# Altium PCB PCB2.PcbDoc
Units mm, origin at the board's own origin, x right, y up, seen from the top; angles counter-clockwise.
Board outline 187.25 x 180.25 mm, 2 copper layers (Top Layer, Bottom Layer); 100 components, 79 nets, 432 pads, 0 vias.
Unrouted connection lines stored in the file: 9.
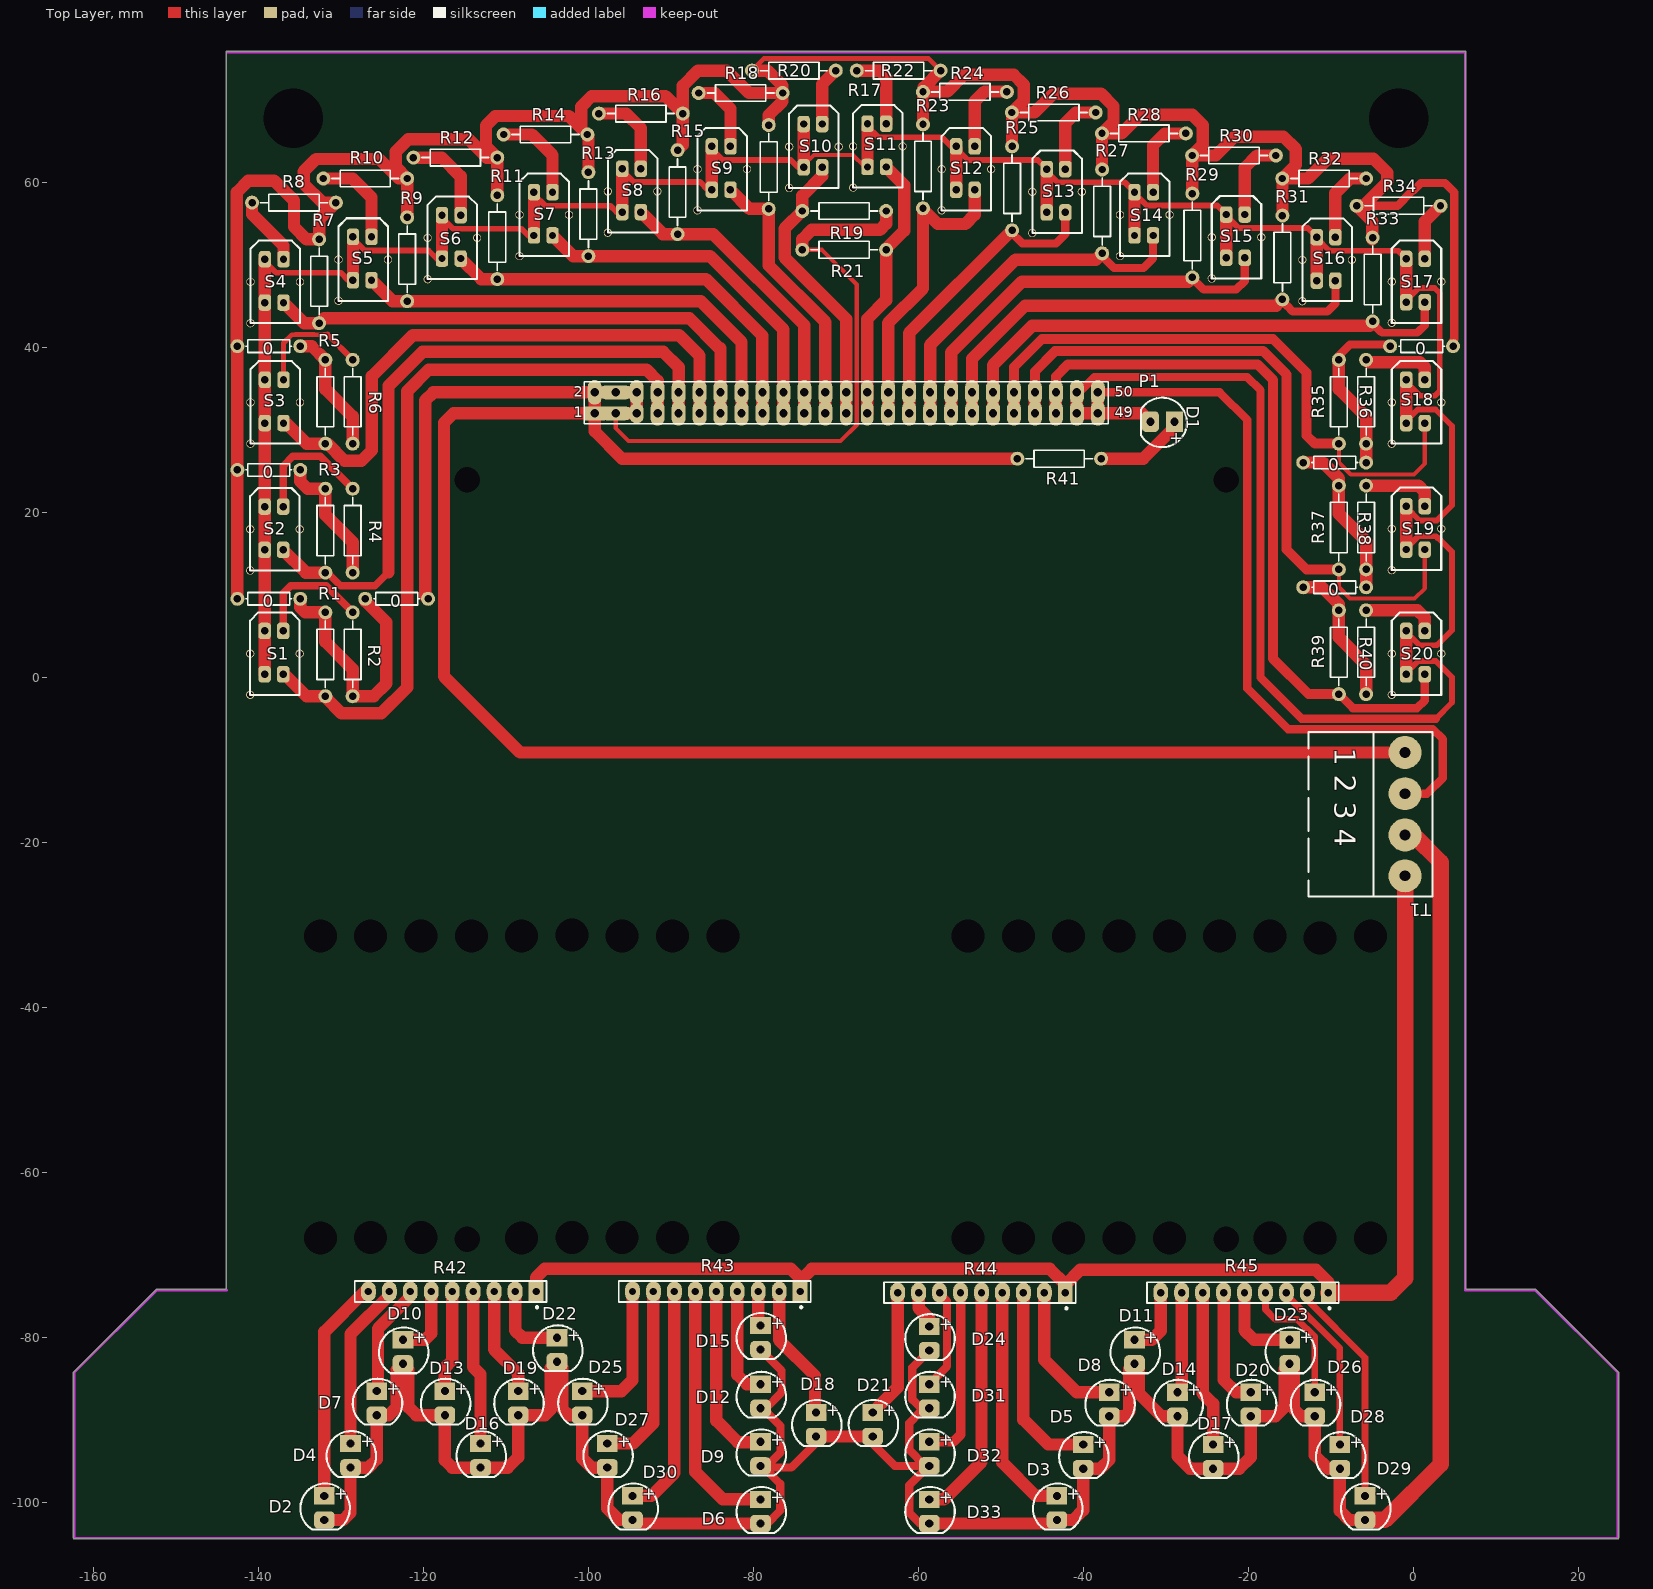
[diagram p0: Top Layer view]
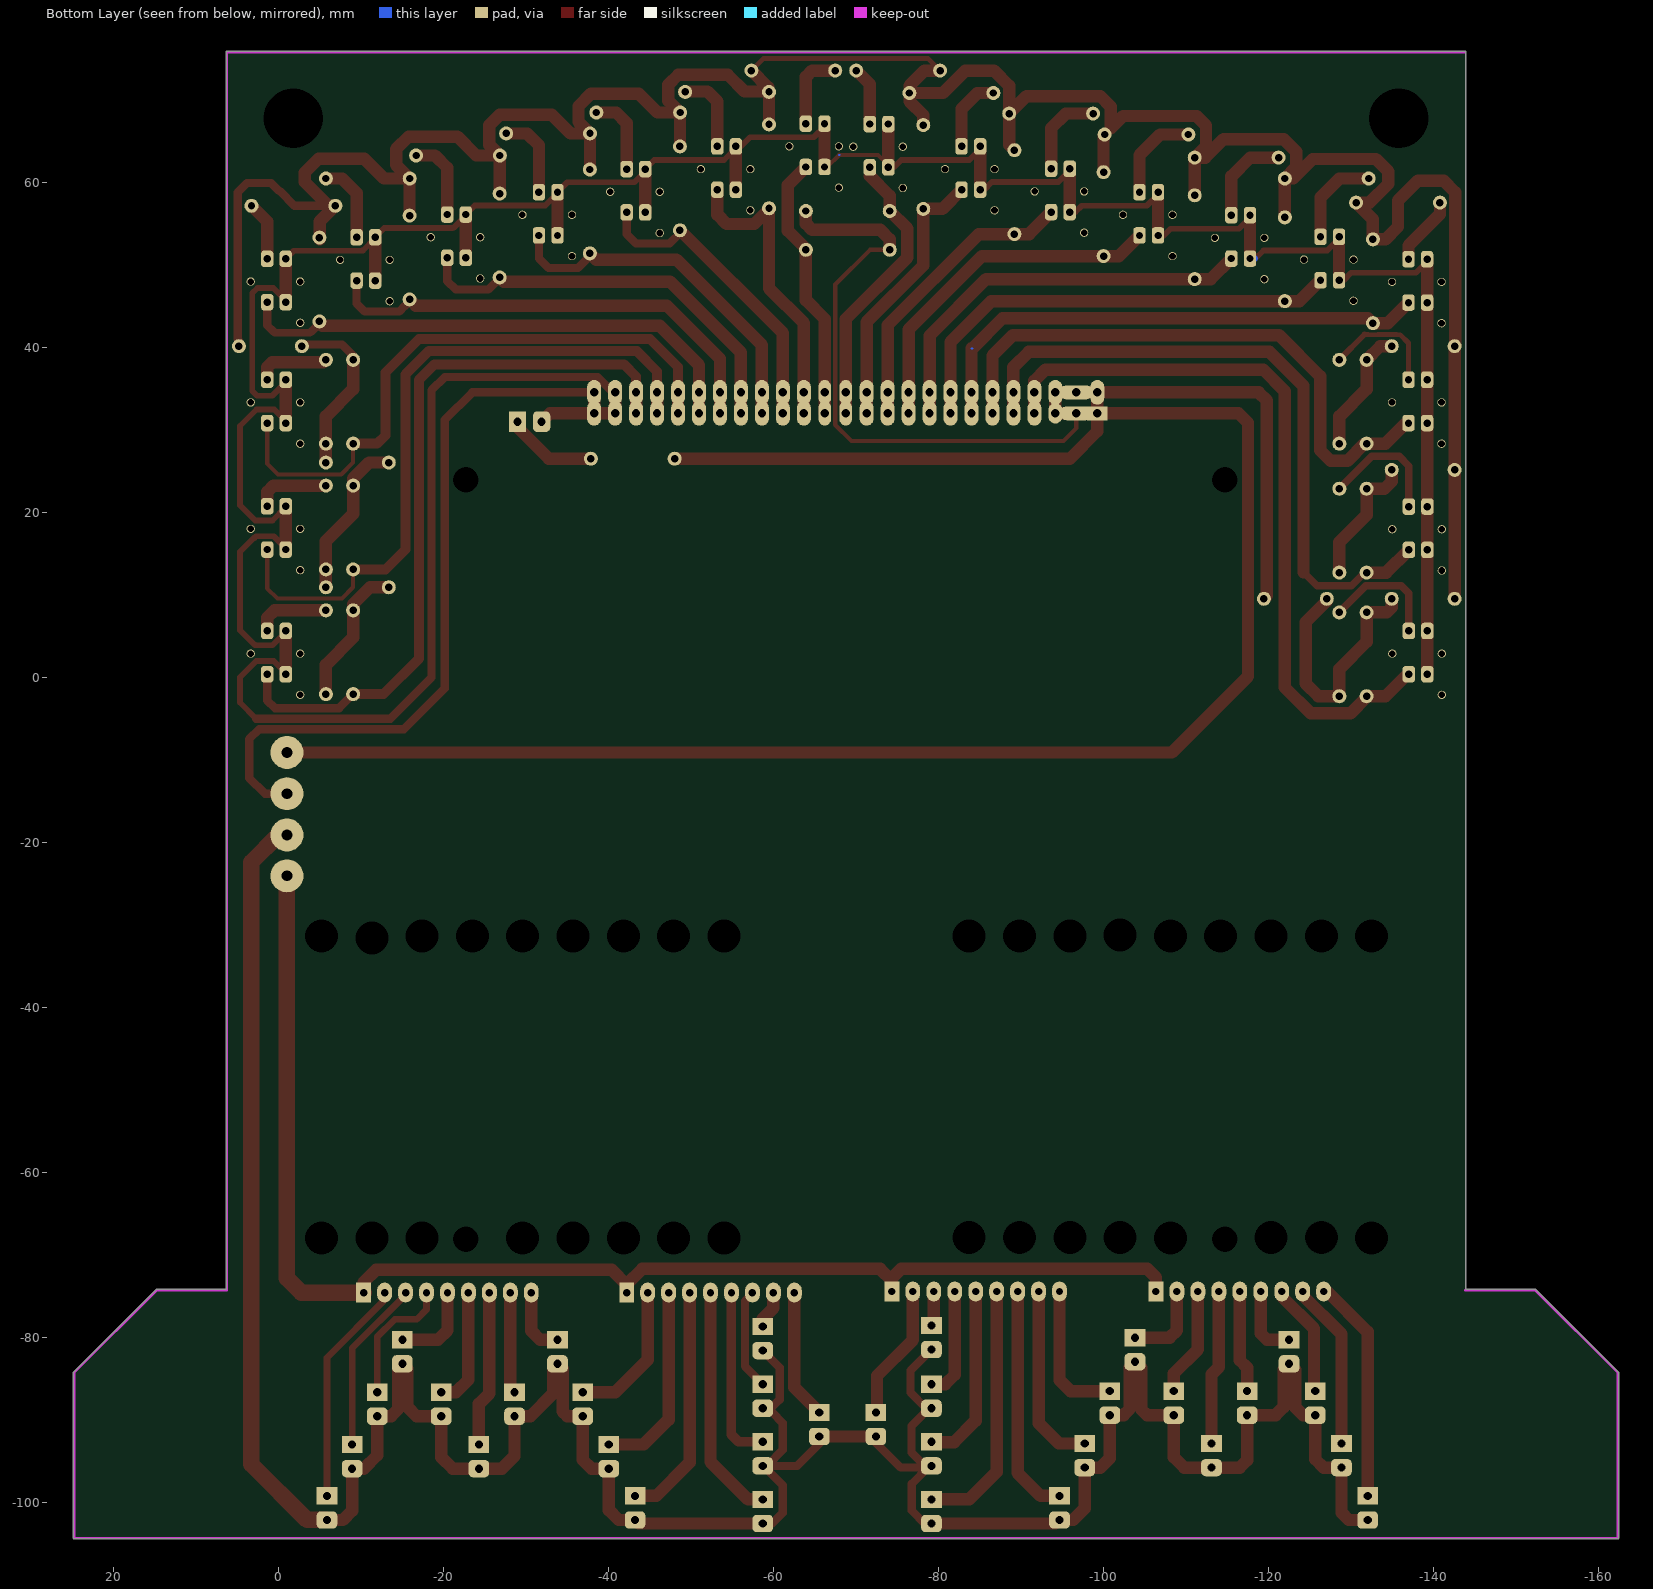
[diagram p1: Bottom Layer view, seen from below]

## Layer stack, top to bottom
Top Solder: solder mask 0.0102, Solder Resist, Dk 3.5
Top Layer: signal copper 0.0356
Dielectric 1: dielectric 0.32, FR-4, Dk 4.8
Bottom Layer: signal copper 0.0356
Bottom Solder: solder mask 0.0102, Solder Resist, Dk 3.5

## Board outline
-162.391,-104.22 -162.391,-84.22 cw(c-162.264,-84.22) -162.354,-84.129 -162.354,-84.13 -152.354,-74.13 -152.355,-74.13 cw(c-152.264,-74.22) -152.264,-74.093 -143.891,-74.093 -143.891,75.78 cw(c-143.764,75.78) -143.764,75.907 6.236,75.907 cw(c6.236,75.78) 6.363,75.78 6.363,-74.093 14.736,-74.093 cw(c14.736,-74.22) 14.826,-74.13 24.826,-84.13 24.826,-84.129 cw(c24.736,-84.22) 24.863,-84.22 24.863,-104.22 cw(c24.736,-104.22) 24.736,-104.347 -162.264,-104.347 cw(c-162.264,-104.22)

## Design rules (kind name [scope] priority, off if disabled: settings)
Clearance [All] p1: gap=0.254 ignorepadtopadclearanceinfootprint=FALSE except(0: Arc-Hole Track-Hole SMDPad-Hole THPad-Hole Via-Hole Fill-Hole Poly-Hole Region-Hole Text-Hole)
PolygonConnect [All] p1: connectstyle=Relief reliefconductorwidth=0.254 reliefentries=4 polygonreliefangle="90 Angle" airgapwidth=0.254
RoutingLayers [All] p1: top layer_v5=TRUE bottom layer_v5=FALSE
RoutingVias [All] p1: holewidth=0.711 width=1.27 viastyle="Through Hole" minholewidth=0.711 minwidth=1.27 maxholewidth=0.711 maxwidth=1.27
SolderMaskExpansion [All] p1: expansion=0.102
Width [All] p1: maxlimit=3 minlimit=0.254 preferedwidth=0.254
29 further rules are at their usual default settings.

## Components (designator, comment, footprint, x,y, rotation, side; value= is the part's Value field where it differs from the comment)
D1 "LED 5mm" LED-1 -30.353,31.035 r270 top
D2 "LED 5mm" LED-1 -131.977,-100.537 r0 top
D3 "LED 5mm" LED-1 -43.204,-100.537 r0 top
D4 "LED 5mm" LED-1 -128.802,-94.187 r0 top
D5 "LED 5mm" LED-1 -40.029,-94.314 r0 top
D6 "LED 5mm" LED-1 -79.121,-100.965 r0 top
D7 "LED 5mm" LED-1 -125.627,-87.837 r0 top
D8 "LED 5mm" LED-1 -36.854,-87.964 r0 top
D9 "LED 5mm" LED-1 -79.121,-93.98 r0 top
D10 "LED 5mm" LED-1 -122.452,-81.614 r0 top
D11 "LED 5mm" LED-1 -33.806,-81.614 r0 top
D12 "LED 5mm" LED-1 -79.121,-86.995 r0 top
D13 "LED 5mm" LED-1 -117.372,-87.837 r0 top
D14 "LED 5mm" LED-1 -28.599,-87.964 r0 top
D15 "LED 5mm" LED-1 -79.121,-79.883 r0 top
D16 "LED 5mm" LED-1 -113.054,-94.187 r0 top
D17 "LED 5mm" LED-1 -24.281,-94.314 r0 top
D18 "LED 5mm" LED-1 -72.39,-90.424 r0 top
D19 "LED 5mm" LED-1 -108.482,-87.837 r0 top
D20 "LED 5mm" LED-1 -19.709,-87.964 r0 top
D21 "LED 5mm" LED-1 -65.532,-90.424 r0 top
D22 "LED 5mm" LED-1 -103.783,-81.36 r0 top
D23 "LED 5mm" LED-1 -15.01,-81.614 r0 top
D24 "LED 5mm" LED-1 -58.674,-80.01 r0 top
D25 "LED 5mm" LED-1 -100.735,-87.837 r0 top
D26 "LED 5mm" LED-1 -11.962,-87.964 r0 top
D27 "LED 5mm" LED-1 -97.687,-94.187 r0 top
D28 "LED 5mm" LED-1 -8.914,-94.314 r0 top
D29 "LED 5mm" LED-1 -5.866,-100.537 r0 top
D30 "LED 5mm" LED-1 -94.639,-100.537 r0 top
D31 "LED 5mm" LED-1 -58.674,-86.995 r0 top
D32 "LED 5mm" LED-1 -58.674,-93.98 r0 top
D33 "LED 5mm" LED-1 -58.674,-100.965 r0 top
P1 "Header 25X2" HDR2X25 -99.211,32.051 r0 top
R1 "Res2" AXIAL-0.4 -131.85,2.841 r90 top
R2 "Res2" AXIAL-0.4 -128.548,2.841 r270 top
R3 "Res2" AXIAL-0.4 -131.85,17.827 r90 top
R4 "Res2" AXIAL-0.4 -128.548,17.827 r270 top
R5 "Res2" AXIAL-0.4 -131.85,33.448 r90 top
R6 "Res2" AXIAL-0.4 -128.548,33.448 r270 top
R7 "Res2" AXIAL-0.4 -132.612,48.053 r90 top
R8 "Res2" AXIAL-0.4 -135.66,57.578 r0 top
R9 "Res2" AXIAL-0.4 -121.944,50.72 r90 top
R10 "Res2" AXIAL-0.4 -127.024,60.499 r0 top
R11 "Res2" AXIAL-0.4 -111.022,53.387 r90 top
R12 "Res2" AXIAL-0.4 -116.102,63.039 r0 top
R13 "Res2" AXIAL-0.4 -99.973,56.181 r90 top
R14 "Res2" AXIAL-0.4 -105.18,65.833 r0 top
R15 "Res2" AXIAL-0.4 -89.178,58.848 r90 top
R16 "Res2" AXIAL-0.4 -93.623,68.373 r0 top
R17 "Res2" AXIAL-0.4 -78.129,61.896 r90 top
R18 "Res2" AXIAL-0.4 -81.534,70.866 r0 top
R19 "Res2" AXIAL-0.4 -68.985,56.562 r0 top
R20 "Res2" AXIAL-0.4 -75.081,73.58 r180 top
R21 "Res2" AXIAL-0.4 -68.985,51.863 r180 top
R22 "Res2" AXIAL-0.4 -62.381,73.58 r0 top
R23 "Res2" AXIAL-0.4 -59.436,61.976 r90 top
R24 "Res2" AXIAL-0.4 -54.356,70.993 r180 top
R25 "Res2" AXIAL-0.4 -48.641,59.309 r90 top
R26 "Res2" AXIAL-0.4 -43.585,68.5 r180 top
R27 "Res2" AXIAL-0.4 -37.719,56.515 r90 top
R28 "Res2" AXIAL-0.4 -32.663,65.96 r180 top
R29 "Res2" AXIAL-0.4 -26.797,53.594 r90 top
R30 "Res2" AXIAL-0.4 -21.741,63.293 r180 top
R31 "Res2" AXIAL-0.4 -15.875,50.927 r90 top
R32 "Res2" AXIAL-0.4 -10.819,60.499 r180 top
R33 "Res2" AXIAL-0.4 -4.953,48.26 r90 top
R34 "Res2" AXIAL-0.4 -1.802,57.197 r180 top
R35 "Res2" AXIAL-0.4 -9.041,33.448 r90 top
R36 "Res2" AXIAL-0.4 -5.739,33.448 r270 top
R37 "Res2" AXIAL-0.4 -9.041,18.208 r90 top
R38 "Res2" AXIAL-0.4 -5.739,18.208 r270 top
R39 "Res2" AXIAL-0.4 -9.041,3.095 r90 top
R40 "Res2" AXIAL-0.4 -5.739,3.095 r270 top
R41 "Res2" AXIAL-0.4 -42.926,26.543 r0 top
R42 "Resistor Array" "Res arrya" -106.323,-74.375 r180 top
R43 "Resistor Array" "Res arrya" -74.319,-74.375 r180 top
R44 "Resistor Array" "Res arrya" -42.188,-74.502 r180 top
R45 "Resistor Array" "Res arrya" -10.311,-74.502 r180 top
S1 "TCRT5000" TCRT5000 -140.966,-2.072 r90 top
S2 "TCRT5000" TCRT5000 -140.966,12.998 r90 top
S3 "TCRT5000" TCRT5000 -140.93,28.365 r90 top
S4 "TCRT5000" TCRT5000 -140.93,42.97 r90 top
S5 "TCRT5000" TCRT5000 -130.262,45.68 r90 top
S6 "TCRT5000" TCRT5000 -119.467,48.304 r90 top
S7 "TCRT5000" TCRT5000 -108.327,51.098 r90 top
S8 "TCRT5000" TCRT5000 -97.623,53.935 r90 top
S9 "TCRT5000" TCRT5000 -86.765,56.642 r90 top
S10 "TCRT5000" TCRT5000 -75.652,59.353 r90 top
S11 "TCRT5000" TCRT5000 -67.905,59.396 r90 top
S12 "TCRT5000" TCRT5000 -57.174,56.642 r90 top
S13 "TCRT5000" TCRT5000 -46.188,53.892 r90 top
S14 "TCRT5000" TCRT5000 -35.556,51.098 r90 top
S15 "TCRT5000" TCRT5000 -24.439,48.387 r90 top
S16 "TCRT5000" TCRT5000 -13.458,45.637 r90 top
S17 "TCRT5000" TCRT5000 -2.627,43.013 r90 top
S18 "TCRT5000" TCRT5000 -2.627,28.365 r90 top
S19 "TCRT5000" TCRT5000 -2.627,13.041 r90 top
S20 "TCRT5000" TCRT5000 -2.627,-2.072 r90 top
T1 "Phoenix terminal" "phoenix terminal 4" -12.7,-6.557 r270 top

## Footprints (in the part's own frame and the unit in brackets; to place one, negate y for a bottom-side part, rotate by r counter-clockwise, add the part's x,y. Pads: shape width x height; smd on the part's side, far side on the other; paste and mask are expansions set on the pad)
AXIAL-0.4 [mm] "Axial Device, Thru-Hole; 2 Leads; 0.4 in Pin Spacing"
  round 1.7 hole 0.9: 1(-5.08,0) 2(5.08,0)
  silkscreen extent -4.06,-1.02 4.06,1.02
HDR2X25 [mm] "Connector; Header; 25x2 Position"
  rect 2.5x1.7 hole 1: 1(0,0)
  oval 1.7x3 hole 1: 2(0,2.54) 6(5.08,2.54) 7(7.62,0) 8(7.62,2.54) 9(10.16,0) 10(10.16,2.54) 11(12.7,0) 12(12.7,2.54) 13(15.24,0) 14(15.24,2.54) 15(17.78,0) 16(17.78,2.54) 17(20.32,0) 18(20.32,2.54) 19(22.86,0) 20(22.86,2.54) 21(25.4,0) 22(25.4,2.54) 23(27.94,0) 24(27.94,2.54) 29(35.56,0) 30(35.56,2.54) 31(38.1,0) 32(38.1,2.54) 33(40.64,0) 34(40.64,2.54) 35(43.18,0) 36(43.18,2.54) 37(45.72,0) 38(45.72,2.54) 39(48.26,0) 40(48.26,2.54) 41(50.8,0) 42(50.8,2.54) 43(53.34,0) 44(53.34,2.54) 45(55.88,0) 46(55.88,2.54) 47(58.42,0) 48(58.42,2.54) 49(60.96,0) 50(60.96,2.54)
  oval 4x1.7 hole 1: 3(2.54,0) 4(2.54,2.54)
  oval 1.7x2.5 hole 1: 5(5.08,0)
  oval 1.5x3 hole 1: 25(30.48,0) 26(30.48,2.54) 27(33.02,0) 28(33.02,2.54)
  silkscreen extent -1.27,-1.27 62.23,3.81
LED-1 [mm] "LED; 2 Leads"
  rect 2.5x2.1 hole 1: 1(0,1.397)
  rrect50% 2.5x2.1 hole 1: 2(0,-1.524)
  silkscreen extent -2.91,-2.67 3.09,2.9
"phoenix terminal 4" [mm] "4 terminals"
  round 4 hole 1.3: 1(2.493,11.684) 2(7.493,11.684) 3(12.493,11.684) 4(17.446,11.684)
  silkscreen extent 0,0 19.94,15
"Res arrya" [mm] "Resistor; Array;"
  rect 1.8x2.4 hole 0.9: 1(0,0)
  oval 1.8x2.4 hole 0.9: 2(2.54,0) 3(5.08,0) 4(7.62,0) 5(10.16,0) 6(12.7,0) 7(15.24,0) 8(17.78,0) 9(20.32,0)
  silkscreen extent -1.27,-1.27 21.97,2.03
TCRT5000 [mm] "IR Sensor 2LEDs"
  round 1 hole 0.8: 0(0,0) 0(5,0) 0(5,-6)
  rrect50% 2x1.5 hole 0.9: A(7.75,-4) C(2.5,-4) E(2.5,-1.75) K(7.75,-1.75)
  silkscreen extent 0,-6 10,0

## Part data
D1 D2 D3 D4 D5 D6 D7 D8 D9 D10 D11 D12 D13 D14 D15 D16 D17 D18 D19 D20 D21 D22 D23 D24 D25 D26 D27 D28 D29 D30 D31 D32 D33: "Typical LED"
P1: "Header, 25-Pin, Dual row"
R1 R2 R3 R4 R5 R6 R7 R8 R9 R10 R11 R12 R13 R14 R15 R16 R17 R18 R19 R20 R21 R22 R23 R24 R25 R26 R27 R28 R29 R30 R31 R32 R33 R34 R35 R36 R37 R38 R39 R40 R41: "Resistor"
R42 R43 R44 R45: library part RES-A8
S1 S2 S3 S4 S5 S6 S7 S8 S9 S10 S11 S12 S13 S14 S15 S16 S17 S18 S19 S20: "IR LED; T&R"
T1: library part "Phoenix terminal 4", "Terminal 4 Pin"

## Free pads (board coordinates)
  round 1.7 hole 0.9: 1(-142.518,9.572) 1(-142.518,25.193) 1(-142.518,40.179) 1(-127.024,9.572) 1(-13.359,10.969) 1(-13.359,26.082) 1(-2.818,40.179) 2(-134.898,9.572) 2(-134.898,25.193) 2(-134.898,40.179) 2(-119.404,9.572) 2(-5.739,10.969) 2(-5.739,26.082) 2(4.802,40.179)
  oct 0x0 hole 7.2: 1(-135.764,67.78) 1(-1.764,67.78)
  oct 0x0 hole 4: 1(-132.461,-67.87) 1(-132.461,-31.294) 1(-126.365,-67.85) 1(-126.365,-31.294) 1(-120.269,-67.85) 1(-120.269,-31.294) 1(-114.173,-31.294) 1(-108.077,-67.87) 1(-108.077,-31.294) 1(-101.981,-67.85) 1(-101.981,-31.167) 1(-95.885,-67.85) 1(-95.885,-31.294) 1(-89.789,-67.85) 1(-89.789,-31.294) 1(-83.693,-67.85) 1(-83.693,-31.294) 1(-53.975,-67.87) 1(-53.975,-31.294) 1(-47.879,-67.87) 1(-47.879,-31.294) 1(-41.783,-67.87) 1(-41.783,-31.294) 1(-35.687,-67.87) 1(-35.687,-31.294) 1(-29.591,-67.87) 1(-29.591,-31.294) 1(-23.495,-31.294) 1(-17.399,-67.87) 1(-17.399,-31.294) 1(-11.303,-67.87) 1(-11.303,-31.548) 1(-5.207,-67.87) 1(-5.207,-31.294)
  oct 0x0 hole 3.1: 1(-114.681,-68.025) 1(-114.681,23.975) 1(-22.681,-68.025) 1(-22.681,23.975)

## Nets (pads, with @x,y where several pads share a name; then routed paths per layer and width w, separated by ;. In a path a pad name is that pad's centre, name@x,y a point inside that pad or via, vN(x,y) a via of type N, cw(c..) or ccw(c..) an arc to the next point about the centre after c; other vN are vias at no path point)
GND: D1.2 P1.47 P1.48 P1.49 P1.50 S1.E S1.K S2.E S2.K S3.E S3.K S4.E S4.K S5.E S5.K S6.E S6.K S7.E S7.K S8.E S8.K S9.E S9.K S10.E S10.K S11.E S11.K S12.E S12.K S13.E S13.K S14.E S14.K S15.E S15.K S16.E S16.K S17.E S17.K S18.E S18.K S19.E S19.K S20.E S20.K T1.2 | length 554
  Top Layer w0.254: S2.K S2.K@-139.18,20.784 ; S5.E@-129.079,48.18 S5.E ; S7.E@-107.267,53.598 S7.E ; S8.E@-96.567,56.435 S8.E ; S9.E@-85.511,59.142 S9.E ; S10.E@-74.578,61.853 S10.E ; S12.K@-56.01,64.392 S12.K
  Top Layer w0.5: S10.E@-73.902,62.115 -72.66,63.357 -70.913,63.357 -70.905,63.349 -67.969,63.349 ; -67.945,63.373 S11.E@-66.468,61.896
  Top Layer w0.7: S4.K -139.18,50.407 -137.847,49.074 -129.973,49.074 S5.E@-129.079,48.18 ; S5.K -128.512,53.201 -127.095,51.784 -119.348,51.784 S6.E@-118.368,50.804 ; S6.K -117.717,55.741 -116.384,54.408 -108.077,54.408 S7.E@-107.267,53.598 ; S7.K -106.577,58.571 -105.208,57.202 -97.334,57.202 S8.E@-96.567,56.435 ; S8.K -95.873,61.456 -94.488,60.071 -86.44,60.071 S9.E@-85.511,59.142 ; S9.K@-85.015,64.06 -83.693,62.738 -81.23,62.738 -81.222,62.746 -75.471,62.746 S10.E@-74.578,61.853 ; S11.K@-66.155,66.79 -64.865,65.5 -57.118,65.5 S12.K@-56.01,64.392 ; S12.K -55.424,64.187 -53.975,62.738 -51.639,62.738 -51.631,62.746 -49.412,62.746 -49.404,62.738 -45.534,62.738 S13.K -44.438,61.329 -43.147,60.038 -34.996,60.038 S14.K -33.806,58.713 -32.313,57.22 -23.772,57.22 S15.K -22.689,56.002 -21.22,54.533 -21.085,54.533 -21.043,54.491 -12.812,54.491 S16.K -11.708,53.252 -10.239,51.783 -10.104,51.783 -10.062,51.741 -1.855,51.741 S17.K ; S20.E@-0.877,0.563 0.592,2.032 2.708,2.032 4.675,0.065 4.675,-3.001 2.723,-4.953 ; S20.K@-0.877,5.543 0.729,3.937 2.821,3.937 2.916,4.032 2.945,4.032 4.675,5.762 4.675,15.264 3.002,16.937 2.916,16.937 2.708,17.145 0.592,17.145 S19.E@-0.877,15.676 ; S19.K -0.877,20.656 0.729,19.05 2.821,19.05 4.675,20.904 4.675,30.502 2.665,32.512 0.508,32.512 S18.E@-0.877,31.127 ; S18.K -0.877,35.802 0.762,34.163 2.596,34.163 3.175,34.742 3.175,46.632 2.563,47.244 0.635,47.244 S17.E@-0.877,45.732
  Top Layer w1: P1.48@-40.537,34.591 -38.679,36.449 -20.146,36.449 -18.542,34.845 -18.542,0.023 -13.566,-4.953 2.723,-4.953 ; P1.50 -23.476,34.591 -20.127,31.242 -20.127,-1.313 -15.217,-6.223 2.333,-6.223 3.556,-7.446 3.556,-12.145 1.651,-14.05 T1.2
  Top Layer w1.5: S1.E S1.K S2.E S2.K ; S2.K@-139.18,20.784 S3.E S3.K S4.E S4.K ; S5.E S5.K ; S6.E S6.K ; S7.E S7.K ; S8.E S8.K ; S9.E S9.K ; S10.E@-73.902,62.115 S10.K ; S11.E S11.K@-66.155,66.79 ; S12.E S12.K@-55.424,64.187 ; S13.E S13.K@-44.438,61.329 ; P1.48 P1.47 P1.49 ; P1.50 P1.49 ; S14.E S14.K@-33.806,58.713 ; D1.2 -32.893,32.051 P1.49 ; S15.E S15.K@-22.689,56.002 ; S16.E S16.K@-11.708,53.252 ; S20.E@-0.877,0.563 S20.K ; S19.E@-0.877,15.676 S19.K ; S18.E@-0.877,31.127 S18.K ; S17.E@-0.877,45.732 S17.K
  Bottom Layer w0.254: S10.E S10.E@-73.902,62.115 ; -67.969,63.349 -67.945,63.373 ; S11.E@-66.468,61.896 S11.E ; P1.48 P1.48@-40.537,34.591 ; S20.E S20.E@-0.877,0.563
  Bottom Layer w0.7: S6.E@-118.368,50.804 S6.E ; S9.K@-85.015,64.06 S9.K ; S11.K@-66.155,66.79 S11.K ; S20.K@-0.877,5.543 S20.K ; S19.E S19.E@-0.877,15.676 ; S18.E S18.E@-0.877,31.127 ; S17.E S17.E@-0.877,45.732
NetD1_1: D1.1 R41.2 | length 11.2
  Top Layer w1.5: R41.2 -32.766,26.543 -28.956,30.353 D1.1
NetD2_1: D2.1 R42.9 | length 27.2
  Top Layer w1.5: D2.1 -131.977,-79.272 -127.08,-74.375 R42.9
NetD2_2: D2.2 D3.2 D4.2 D5.2 D6.2 D7.2 D8.2 D9.2 D10.2 D11.2 D12.2 D13.2 D14.2 D15.2 D16.2 D17.2 D18.2 D19.2 D20.2 D21.2 D22.2 D23.2 D24.2 D25.2 D26.2 D27.2 D28.2 D29.2 D30.2 D31.2 D32.2 D33.2 T1.3 | length 382.4
  Top Layer w0.254: D23.2@-15.621,-83.749 D23.2 ; T1.3 T1.3@0,-19.05
  Top Layer w1: D15.2 -76.581,-83.947 -76.581,-86.614 -78.486,-88.519 -78.665,-88.698 -77.469,-89.894 ; D9.2@-78.693,-95.711 -76.732,-97.672 -76.732,-100.918 D6.2@-78.303,-102.489 ; D9.2@-78.529,-95.711 -76.708,-93.89 -76.708,-90.678 -77.354,-90.032 ; D9.2@-78.002,-95.711 -75.391,-95.711 D18.2@-71.628,-91.948 ; D21.2@-66.398,-91.948 -62.842,-95.504 -59.159,-95.504 -58.952,-95.711 -61.087,-97.846 -61.087,-101.219 D33.2@-59.817,-102.489 ; D31.2@-59.833,-89.043 -61.087,-90.297 -61.087,-93.576 D32.2@-59.286,-95.377 ; D31.2@-59.516,-88.693 -60.73,-87.479 -60.73,-83.59 D24.2@-59.425,-82.284
  Top Layer w1.5: D2.2 -129.691,-102.061 -128.802,-101.172 D4.2 -126.643,-95.711 -125.627,-94.695 D7.2 ; D7.2@-125.048,-89.361 -124.159,-89.361 -123.19,-88.392 -123.19,-83.876 D10.2 -121.793,-83.797 -121.793,-88.392 -120.824,-89.361 D13.2 -117.372,-94.822 -116.483,-95.711 D16.2 -109.752,-95.711 -108.482,-94.441 D19.2 -105.236,-89.361 -104.521,-88.646 D22.2@-104.521,-83.622 ; D22.2 -103.124,-83.543 -103.124,-88.646 -102.409,-89.361 D25.2@-101.52,-89.361 ; D25.2 -100.735,-94.568 -99.592,-95.711 D27.2 -97.687,-100.664 -96.29,-102.061 D30.2 ; D30.2@-94.107,-102.489 D6.2 ; D9.2@-78.693,-95.711 D9.2@-78.529,-95.711 ; D18.2@-71.628,-91.948 D21.2@-66.398,-91.948 ; D33.2 D3.2@-43.632,-102.489 ; D3.2 -41.228,-102.061 -40.029,-100.862 D5.2 -37.926,-95.838 -36.854,-94.766 D8.2 -35.005,-89.488 -34.417,-88.9 -34.417,-83.749 D11.2 ; D11.2@-33.274,-83.67 -33.274,-86.741 -30.527,-89.488 D14.2 -28.599,-94.314 -27.075,-95.838 D17.2 -21.106,-95.838 -19.709,-94.441 D20.2 -16.717,-89.488 -15.621,-88.392 D23.2@-15.621,-83.749 ; D23.2 -14.478,-83.67 -14.478,-88.646 -13.636,-89.488 D26.2 -11.962,-94.21 -10.334,-95.838 D28.2 -8.914,-100.941 -7.794,-102.061 D29.2
  Top Layer w2: D29.2 -3.453,-102.061 3.302,-95.306 3.302,-22.352 T1.3@0,-19.05
  Bottom Layer w0.254: D7.2 D7.2@-125.048,-89.361 ; D22.2@-104.521,-83.622 D22.2 ; D25.2@-101.52,-89.361 D25.2 ; D30.2 -94.465,-102.235 -94.361,-102.235 D30.2@-94.107,-102.489 ; D6.2 D6.2@-78.303,-102.489 ; D12.2 D12.2@-78.486,-88.519 ; D33.2@-59.817,-102.489 D33.2 ; D31.2@-59.516,-88.693 -59.516,-89.361 D31.2@-58.571,-89.361 ; D3.2@-43.632,-102.489 D3.2 ; D11.2 D11.2@-33.274,-83.67
NetD3_1: D3.1 R44.4 | length 28.9
  Top Layer w1.5: R44.4 -49.808,-95.099 -45.767,-99.14 D3.1
NetD4_1: D4.1 R42.8 | length 20.4
  Top Layer w1.5: D4.1 -128.802,-79.527 R42.8@-124.103,-74.828
  Bottom Layer w0.254: R42.8@-124.103,-74.827 R42.8
NetD5_1: D5.1 R44.3 | length 23.9
  Top Layer w1.5: R44.3 -47.268,-89.892 -44.243,-92.917 D5.1
NetD6_1: D6.1 R43.6 | length 30.8
  Top Layer w1.5: R43.6 -87.019,-96.242 -83.693,-99.568 D6.1@-79.446,-99.568
NetD7_1: D7.1 R42.7 | length 13.7
  Top Layer w1.5: D7.1@-125.476,-86.289 -125.476,-78.867 -121.69,-75.081 R42.7@-121.69,-74.502
  Bottom Layer w0.254: R42.7@-121.69,-74.502 R42.7
  Bottom Layer w1.5: D7.1 D7.1@-125.476,-86.289
NetD8_1: D8.1 R44.2 | length 17.6
  Top Layer w1.5: R44.2 -44.728,-82.653 -40.814,-86.567 D8.1
NetD9_1: D9.1 R43.5 | length 22
  Top Layer w1.5: R43.5 -84.479,-90.019 -81.863,-92.635 D9.1@-79.173,-92.635
NetD10_1: D10.1 R42.6 | length 8.8
  Top Layer w1.5: D10.1 -119.785,-80.217 -119.023,-79.455 R42.6
NetD11_1: D11.1 R45.9 | length 8.3
  Top Layer w1.5: D11.1 -31.703,-80.217 -30.631,-79.145 R45.9
NetD12_1: D12.1 R43.4 | length 13.4
  Top Layer w1.5: R43.4 -81.939,-84.455 -80.796,-85.598 D12.1
NetD13_1: D13.1 R42.5 | length 12.4
  Top Layer w1.5: D13.1 -117.372,-83.59 -116.483,-82.701 R42.5
NetD14_1: D14.1 R45.8 | length 12.3
  Top Layer w1.5: D14.1@-28.091,-86.059 R45.8
  Bottom Layer w0.254: D14.1 D14.1@-28.091,-86.059
NetD15_1: D15.1 R43.3 | length 4.2
  Top Layer w1.5: D15.1@-79.399,-78.208 R43.3
  Bottom Layer w1.5: D15.1@-79.399,-78.208 D15.1
NetD16_1: D16.1 R42.4 | length 18.8
  Top Layer w1.5: R42.4 -113.943,-83.519 -113.054,-84.408 D16.1
NetD17_1: D17.1 R45.7 | length 18.9
  Top Layer w1.5: R45.7 -25.551,-86.717 -24.281,-87.987 D17.1
NetD18_1: D18.1 R43.2 | length 16.5
  Top Layer w1.5: R43.2 -76.859,-80.24 -72.517,-84.582 D18.1@-72.517,-89.027
NetD19_1: D19.1 R42.3 | length 13.3
  Top Layer w1.5: R42.3 -111.403,-81.383 -108.482,-84.304 D19.1
NetD20_1: D20.1 R45.6 | length 14.5
  Top Layer w1.5: R45.6 -23.011,-85.066 -21.51,-86.567 D20.1
NetD21_1: D21.1 R44.9 | length 16.6
  Top Layer w1.5: D21.1 -62.508,-86.003 R44.9
  Bottom Layer w0.254: D21.1@-65.556,-89.869 -65.556,-89.051 D21.1
NetD22_1: D22.1 R42.2 | length 10.1
  Top Layer w1.5: R42.2 -108.863,-79.074 -107.974,-79.963 D22.1
NetD23_1: D23.1 R45.5 | length 10.5
  Top Layer w1.5: R45.5 -20.471,-79.074 -19.328,-80.217 D23.1
NetD24_1: D24.1 R44.8 | length 4.6
  Top Layer w1.5: R44.8 -59.968,-76.371 -58.674,-77.665 D24.1
NetD25_1: D25.1 R43.9 | length 17.4
  Top Layer w1.5: D25.1 -95.965,-86.44 -94.639,-85.114 R43.9
NetD26_1: D26.1 R45.4 | length 15.9
  Top Layer w0.8: R45.4 -17.931,-76.557 -16.764,-77.724 -14.097,-77.724 -11.938,-79.883 -11.938,-81.915 ; D26.1@-11.962,-86.313 -11.962,-81.915
NetD27_1: D27.1 R43.8 | length 22.6
  Top Layer w1.5: D27.1 -94.568,-92.79 -92.099,-90.321 R43.8
NetD28_1: D28.1 R45.3 | length 21.1
  Top Layer w0.8: R45.3@-15.391,-74.779 -8.914,-81.256 D28.1
  Bottom Layer w0.8: R45.3@-15.391,-74.779 R45.3
NetD29_1: D29.1 R45.2 | length 27.5
  Top Layer w0.8: R45.2@-12.851,-75.414 -5.866,-82.399 D29.1
  Bottom Layer w0.254: R45.2@-12.851,-75.414 R45.2
NetD30_1: D30.1 R43.7 | length 28.2
  Top Layer w1.5: D30.1 -92.353,-99.14 -89.559,-96.346 R43.7
NetD31_1: D31.1 R44.7 | length 13.2
  Top Layer w1: D31.1@-58.571,-85.495 -56.515,-83.439 -56.515,-75.514 -57.428,-74.601 R44.7
  Bottom Layer w0.254: D31.1@-58.571,-86.44 D31.1@-58.571,-85.495
NetD32_1: D32.1 R44.6 | length 21.4
  Top Layer w1.2: D32.1@-58.364,-92.583 -55.753,-92.583 -54.864,-91.694 R44.6@-54.864,-74.502
  Top Layer w1.5: D32.1@-58.571,-92.79 D32.1@-58.364,-92.583
NetD33_1: D33.1 R44.5 | length 28.6
  Top Layer w1.5: D33.1@-58.397,-99.314 -58.143,-99.568 -56.896,-99.568 -52.348,-95.02 R44.5
NetP1_7: P1.7 P1.8 R1.1 S1.C | length 90.2
  Top Layer w0.254: S1.C S1.C@-136.803,0.428 ; R1.1@-131.85,-2.366 R1.1
  Top Layer w1.5: S1.C@-136.803,0.428 -134.136,-2.239 R1.1 ; R1.1@-131.85,-2.366 -129.898,-4.318 -125.095,-4.318 -121.92,-1.143 -121.92,34.742 -119.324,37.338 -92.941,37.338 -91.591,35.988 P1.8 P1.7
NetP1_9: P1.9 P1.10 R3.1 S2.C | length 81.1
  Top Layer w0.254: -130.199,11.35 -129.975,11.126
  Top Layer w0.9: R3.1@-131.596,12.747 -130.199,11.35 ; -129.975,11.126 -125.851,11.126 -124.206,12.771
  Top Layer w1.5: S2.C -134.215,12.747 R3.1 ; -124.206,12.771 -124.206,35.377 -120.086,39.497 -90.909,39.497 -89.051,37.639 P1.10 P1.9
  Bottom Layer w0.254: R3.1 R3.1@-131.596,12.747
NetP1_11: P1.11 P1.12 R5.1 S3.C | length 71.9
  Top Layer w0.254: S3.C S3.C@-136.633,30.865 ; -126.238,27.559 -126.238,27.813
  Top Layer w1.5: S3.C@-136.633,30.865 -134.136,28.368 R5.1 -131.619,28.368 -129.54,26.289 -127.508,26.289 -126.238,27.559 ; -126.238,27.813 -126.238,36.52 -121.229,41.529 -89.004,41.529 -86.511,39.036 P1.12 P1.11
NetP1_13: P1.13 P1.14 R7.1 S4.C | length 63.6
  Top Layer w1.5: S4.C -134.433,42.973 R7.1 -132.024,43.561 -87.734,43.561 -84.098,39.925 ; P1.13 P1.14 -83.971,39.925
  Bottom Layer w0.254: -84.098,39.925 -83.971,39.925
NetP1_15: P1.15 P1.16 R9.1 S5.C | length 56.6
  Top Layer w1.5: S5.C -123.722,45.64 R9.1 -86.384,45.64 -81.431,40.687 P1.16 P1.15
NetP1_17: P1.17 P1.18 R11.1 S6.C | length 49.8
  Top Layer w1.5: S6.C -112.97,48.307 R11.1 -85.749,48.307 -78.891,41.449 P1.18 P1.17
NetP1_19: P1.19 P1.20 R13.1 S7.C | length 42.9
  Top Layer w1.5: S7.C -101.83,51.101 R13.1 -85.241,51.101 -76.351,42.211 P1.20 P1.19
NetP1_21: P1.21 P1.22 R15.1 S8.C | length 36.2
  Top Layer w1.5: S8.C -90.956,53.768 R15.1 -84.86,53.768 -73.811,42.719 P1.22 P1.21
NetP1_23: P1.23 P1.24 R17.1 S9.C | length 33.2
  Top Layer w1.5: S9.C -80.439,56.816 R17.1 -78.129,49.958 -71.271,43.1 P1.24 P1.23
NetP1_25: P1.25 P1.26 R19.1 S10.C | length 34.8
  Top Layer w0.254: -71.652,60.809 S10.C
  Top Layer w1.5: -71.652,60.809 -74.065,58.396 R19.1 -76.2,54.427 -76.2,50.95 -68.731,43.481 P1.26 P1.25
NetP1_27: P1.27 P1.28 R21.1 S11.C | length 32.6
  Top Layer w1.5: P1.27 P1.28 -66.191,43.481 -63.905,45.767 R21.1 ; R21.1@-63.905,51.99 -61.722,54.173 -61.722,59.713 S11.C
  Bottom Layer w0.254: R21.1 R21.1@-63.905,51.99
NetP1_29: P1.29 P1.30 R23.1 S12.C | length 37.4
  Top Layer w1.5: P1.29 P1.30 -63.651,42.973 -59.436,47.188 R23.1@-59.436,56.777 ; S12.C -53.174,56.117 -54.3,54.991 -57.65,54.991 R23.1@-59.436,56.777 ; R23.1@-59.436,56.777 R23.1 -59.555,56.896 R23.1@-59.436,56.777
NetP1_31: P1.31 P1.32 R25.1 S13.C | length 37.4
  Top Layer w1: R25.1@-48.82,54.05 -47.395,52.625 -43.331,52.625 -42.188,53.768 S13.C
  Top Layer w1.5: P1.31 P1.32 -61.111,41.759 R25.1@-48.82,54.05
NetP1_33: P1.33 P1.34 R27.1 S14.C | length 43.8
  Top Layer w1: R27.1@-37.763,51.121 -36.299,49.657 -32.71,49.657 -31.556,50.811 S14.C
  Top Layer w1.5: P1.33 P1.34 -58.571,40.306 -48.204,50.673 -38.481,50.673 R27.1
NetP1_35: P1.35 P1.36 R29.1 S15.C | length 50
  Top Layer w0.254: R29.1@-27.305,48.006 R29.1
  Top Layer w1: R29.1@-26.393,48.006 -25.424,47.037 -21.487,47.037 -20.439,48.085 S15.C
  Top Layer w1.5: P1.35 P1.36 -56.031,39.417 -47.442,48.006 R29.1@-27.305,48.006
NetP1_37: P1.37 P1.38 R31.1 S16.C | length 56.6
  Top Layer w1: -15.344,45.085 -14.629,44.37 -10.438,44.37 -9.458,45.35 S16.C
  Top Layer w1.5: P1.37 P1.38 -53.491,38.655 -47.061,45.085 -16.637,45.085 R31.1
NetP1_39: P1.39 P1.40 R33.1 S17.C | length 63.9
  Top Layer w0.9: -3.914,41.91 -3.813,41.809 0.463,41.809 0.564,41.91
  Top Layer w1: R33.1@-4.977,42.973 -3.914,41.91 ; 0.564,41.91 1.373,42.719 S17.C
  Top Layer w1.5: P1.39 P1.40 -50.951,37.893 -46.172,42.672 -5.278,42.672 R33.1@-4.977,42.973
NetP1_41: P1.41 P1.42 R35.1 S18.C | length 74.8
  Top Layer w0.5: R35.1 -9.041,26.082 -7.597,24.638 -6.304,24.638 -6.3,24.642 -5.178,24.642 -5.174,24.638 0.056,24.638 1.373,25.955 S18.C
  Top Layer w1.2: P1.42 -48.411,37.639 -45.007,41.043 -17.017,41.043 -12.954,36.98 -12.954,29.36 -11.962,28.368 R35.1
  Top Layer w1.5: P1.41 P1.42
NetP1_43: P1.43 P1.44 R37.1 S19.C | length 84.7
  Top Layer w0.5: R37.1 -9.041,10.969 -7.687,9.615 0.146,9.615 1.373,10.842 S19.C
  Top Layer w1.2: P1.44 -45.871,37.131 -43.413,39.589 -18.206,39.589 -15.391,36.774 -15.391,15.541 -12.978,13.128 R37.1
  Top Layer w1.5: P1.43 P1.44
NetP1_45: P1.45 P1.46 R39.1 S20.C | length 90.4
  Top Layer w1: R39.1 -7.343,-3.683 0.437,-3.683 1.373,-2.747 S20.C
  Top Layer w1.2: P1.46 -43.331,36.496 -41.842,37.985 -18.888,37.985 -17.018,36.115 -17.018,2.309 -12.724,-1.985 R39.1
  Top Layer w1.5: P1.45 P1.46
NetR2_1: R2.1 S1.A | length 14.7
  Top Layer w0.9: S1.A -136.966,10.227 -136.05,11.143 -131.77,11.143 R2.1
NetR4_1: R4.1 S2.A | length 15.5
  Top Layer w0.9: S2.A -136.966,25.665 -135.787,26.844 -132.485,26.844 R4.1
NetR6_1: R6.1 S3.A | length 14.5
  Top Layer w0.6: S3.A -136.93,40.56 -135.921,41.569 -135.494,41.569 -135.48,41.583 -133.208,41.583 -133.194,41.569 -132.03,41.569 -132.016,41.583 -131.603,41.583
  Top Layer w0.7: -131.603,41.583 R6.1
NetR8_1: R8.1 S4.A | length 8.4
  Top Layer w1.5: R8.1 -140.74,56.181 -136.93,52.371 S4.A
NetR10_1: R10.1 S5.A | length 11.6
  Top Layer w1.5: R10.1 -128.548,60.499 -126.262,58.213 S5.A
NetR12_1: R12.1 S6.A | length 11.4
  Top Layer w1.5: R12.1 -117.753,63.039 -115.467,60.753 S6.A
NetR14_1: R14.1 S7.A | length 11.5
  Top Layer w1.5: R14.1 -106.831,65.833 -104.327,63.329 S7.A
NetR16_1: R16.1 S8.A | length 10.7
  Top Layer w1.5: R16.1 -95.401,68.373 -93.623,66.595 S8.A
NetR18_1: R18.1 S9.A | length 9.2
  Top Layer w1.5: R18.1 -84.686,70.866 -82.765,68.945 S9.A
NetR20_1: R20.1 S10.A | length 7.2
  Top Layer w1.5: S10.A -71.652,71.929 R20.1
NetR22_1: R22.1 S11.A | length 9.5
  Top Layer w1.5: R22.1 -64.667,73.58 -63.905,72.818 S11.A
NetR24_1: R24.1 S12.A | length 9.9
  Top Layer w1.5: S12.A -53.174,69.833 -51.967,71.04 R24.1@-49.173,71.04
NetR26_1: R26.1 S13.A | length 9.8
  Top Layer w1.5: S13.A -42.188,67.23 -40.918,68.5 R26.1
NetR28_1: R28.1 S14.A | length 10.2
  Top Layer w1.5: S14.A -31.556,64.527 -30.123,65.96 R28.1
NetR30_1: R30.1 S15.A | length 10.1
  Top Layer w1.5: S15.A -20.439,61.801 -18.947,63.293 R30.1
NetR32_1: R32.1 S16.A | length 9.8
  Top Layer w1.5: S16.A -9.458,58.741 -7.7,60.499 R32.1
NetR34_1: R34.1 S17.A | length 7.2
  Top Layer w1.5: S17.A 1.373,55.292 R34.1
NetR36_1: R36.1 S18.A | length 9
  Top Layer w1.5: R36.1 -5.438,38.227 0.785,38.227 1.373,37.639 S18.A
NetR38_1: R38.1 S19.A | length 9.2
  Top Layer w1.5: R38.1 0.611,23.288 1.373,22.526 S19.A
NetR40_1: R40.1 S20.A | length 9.1
  Top Layer w1.5: R40.1 0.484,8.175 1.373,7.286 S20.A
NetR42_1: R42.1 R43.1 R44.1 R45.1 T1.4 | length 164
  Top Layer w0.254: R44.1 R44.1@-42.188,-73.557
  Top Layer w1.5: R42.1 -106.323,-72.668 -105.283,-71.628 -75.438,-71.628 -74.319,-72.747 -74.319,-73.049 ; R43.1 -74.319,-73.049 ; R45.1 -10.311,-73.255 -11.811,-71.755 -40.386,-71.755 -42.188,-73.557 -42.188,-73.509 -44.069,-71.628 -72.898,-71.628 -74.319,-73.049
  Top Layer w2: R45.1 -2.747,-74.502 -1.016,-72.771 T1.4
NetT1_1: 
NetU1_3: 
VCC: P1.1 P1.2 P1.3 P1.4 P1.5 P1.6 pad.1@-2.818,40.179 pad.1@-13.359,10.969 pad.1@-13.359,26.082 pad.1@-127.024,9.572 pad.1@-142.518,9.572 pad.1@-142.518,25.193 pad.1@-142.518,40.179 pad.2 R1.2 R2.2 R3.2 R4.2 R5.2 R6.2 R7.2 R8.2 R9.2 R10.2 R11.2 R12.2 R13.2 R14.2 R15.2 R16.2 R17.2 R18.2 R19.2 R20.2 R21.2 R22.2 R23.2 R24.2 R25.2 R26.2 R27.2 R28.2 R29.2 R30.2 R31.2 R32.2 R33.2 R34.2 R35.2 R36.2 R37.2 R38.2 R39.2 R40.2 R41.1 T1.1 | length 842.1
  Top Layer w0.254: pad.1@-127.024,9.295 pad.1@-127.024,9.572 ; -100.838,66.571 R14.2 R14.2@-99.973,65.706 ; R35.2 R35.2@-9.041,39.036 ; -0.151,58.975 -0.08,58.975
  Top Layer w0.5: P1.3 -96.671,30.25 -95.123,28.702 -69.413,28.702 -67.461,30.654 -67.461,47.672 -71.652,51.863 R21.2
  Top Layer w0.6: R20.2 -78.684,75.057 -58.778,75.057 R22.2
  Top Layer w1: R35.2@-9.041,39.036 -7.691,40.386 pad.1@-3.025,40.386 ; -5.16,57.197 -1.929,57.197 -0.151,58.975 ; -0.08,58.975 0.889,59.944 3.81,59.944 4.953,58.801 4.953,41.021 pad.2@4.802,40.87
  Top Layer w1.5: pad.1@-142.518,9.572 -142.518,25.193 -142.518,40.179 -142.594,40.255 -142.594,58.828 -141.177,60.245 -138.073,60.245 -135.66,57.832 -135.66,54.657 -134.136,53.133 R7.2 -132.612,55.546 R8.2 -132.207,57.578 -134.493,59.864 -134.493,61.341 -132.969,62.865 -125.326,62.865 -122.96,60.499 R10.2 ; pad.2@-134.898,9.572 -134.898,8.533 -134.286,7.921 R1.2 -131.85,4.365 -128.548,1.063 R2.2 -126.008,-2.239 -124.46,-0.691 -124.46,6.731 pad.1@-127.024,9.295 ; pad.2@-134.898,25.193 -134.898,23.796 -134.009,22.907 R3.2 -131.85,19.732 -128.548,16.43 R4.2 ; pad.2@-134.898,40.179 -133.501,40.179 R5.2 -131.85,34.972 -128.548,31.67 R6.2 ; R9.2 R10.2 ; pad.2@-119.404,9.572 -119.761,9.929 -119.761,33.599 -118.769,34.591 P1.2 ; R11.2 R12.2 ; R13.2 R14.2@-99.973,65.706 ; R15.2 -88.543,64.563 R16.2 ; R20.2 -78.279,73.58 -76.454,71.755 R18.2 -76.454,69.85 -78.129,68.175 R17.2 ; -77.447,70.866 -80.518,70.866 -83.232,73.58 -86.694,73.58 -88.543,71.731 R16.2 ; R21.2 -74.065,53.133 -72.922,54.276 -64.667,54.276 -63.905,55.038 R19.2 ; R23.2@-59.436,67.183 R24.2 ; R24.2@-59.333,71.04 -56.468,71.04 -54.436,73.072 -48.434,73.072 -47.244,71.882 -47.244,69.921 R26.2 -45.927,68.5 -43.641,70.786 -37.87,70.786 -36.346,69.262 -36.346,67.357 R28.2 ; R24.2@-59.333,71.548 R22.2 ; R25.2 R26.2@-48.641,68.476 ; R41.1 -95.885,26.543 -99.211,29.869 P1.1 ; R27.2@-37.743,61.619 R28.2 ; R29.2@-26.821,58.594 R30.2 ; R31.2 R32.2@-15.875,60.475 ; pad.1@-13.359,10.969 -11.096,10.969 -9.041,8.914 R39.2 -9.041,4.873 -5.739,1.571 R40.2 ; pad.1@-13.359,26.082 -10.969,26.082 -9.041,24.154 R37.2 -9.041,19.859 -5.739,16.557 R38.2 pad.2@-5.739,10.969 ; R35.2 -9.041,34.972 -5.739,31.67 R36.2 pad.2@-5.739,26.082 ; R33.2@-4.977,53.133 -4.977,55.292 R34.2 -6.049,57.197 -3.175,60.071 -3.175,61.214 -4.873,62.912 -10.367,62.912 -12.78,60.499 R32.2 -14.248,62.15 -14.248,64.055 -15.772,65.579 -21.67,65.579 -23.956,63.293 R30.2 ; T1.1 -108.251,-9.05 -117.475,0.174 -117.475,30.908 -116.332,32.051 P1.1 ; R10.2 -123.317,61.872 -123.317,63.754 -121.793,65.278 -114.531,65.278 -112.292,63.039 R12.2 ; R12.2 -112.395,64.412 -112.395,66.929 -111.252,68.072 -102.339,68.072 -100.838,66.571 -100.838,69.215 -99.568,70.485 -90.655,70.485 R16.2 ; P1.1 P1.3 P1.5 P1.6 P1.4 P1.2 ; P1.1 P1.2 ; R28.2 -35.386,65.96 -33.1,68.246 -26.821,68.246 -25.551,66.976 -25.551,64.563 R30.2
  Bottom Layer w0.254: R23.2@-59.563,67.056 -59.436,67.183 R23.2 ; R24.2@-59.333,71.04 R24.2@-59.333,71.548 ; R26.2 R26.2@-48.641,68.476 ; R27.2@-37.743,61.619 R27.2 ; R32.2 R32.2@-15.875,60.475 ; pad.2@4.802,40.87 4.802,40.179 pad.2@4.953,40.33
pads on no net: S1.0 S2.0 S3.0 S4.0 S5.0 S6.0 S7.0 S8.0 S9.0 S10.0 S11.0 S12.0 S13.0 S14.0 S15.0 S16.0 S17.0 S18.0 S19.0 S20.0

## Keep-outs
Keep-Out Layer:
  lines w0.254: -143.764,-74.22 -152.264,-74.22 -162.264,-84.22 -162.264,-104.22 -142.264,-104.22 24.736,-104.22 24.736,-84.22 14.736,-74.22 6.236,-74.22 6.236,75.78 4.736,75.78 -142.264,75.78 -143.764,75.78

## Silkscreen, mask and mechanical layers (free items; w line width, h text height)
Top Overlay:
  lines w0.2: -141.477,9.572 -141.248,9.572 ; -141.477,25.193 -141.248,25.193 ; -141.477,40.179 -141.248,40.179 ; -135.939,9.572 -136.168,9.572 ; -135.939,25.193 -136.168,25.193 ; -135.939,40.179 -136.168,40.179 ; -125.983,9.572 -125.754,9.572 ; -120.445,9.572 -120.674,9.572 ; -12.318,10.969 -12.089,10.969 ; -12.318,26.082 -12.089,26.082 ; -6.78,10.969 -7.009,10.969 ; -6.78,26.082 -7.009,26.082 ; -1.777,40.179 -1.548,40.179 ; 3.761,40.179 3.532,40.179 ; -136.168,9.572 -136.168,10.334 -141.248,10.334 -141.248,8.81 -136.168,8.81 -136.168,9.572 ; -136.168,25.193 -136.168,25.955 -141.248,25.955 -141.248,24.431 -136.168,24.431 -136.168,25.193 ; -136.168,40.179 -136.168,40.941 -141.248,40.941 -141.248,39.417 -136.168,39.417 -136.168,40.179 ; -120.674,9.572 -120.674,10.334 -125.754,10.334 -125.754,8.81 -120.674,8.81 -120.674,9.572 ; -7.009,10.969 -7.009,11.731 -12.089,11.731 -12.089,10.207 -7.009,10.207 -7.009,10.969 ; -7.009,26.082 -7.009,26.844 -12.089,26.844 -12.089,25.32 -7.009,25.32 -7.009,26.082 ; 3.532,40.179 3.532,40.941 -1.548,40.941 -1.548,39.417 3.532,39.417 3.532,40.179
  text "0" at -139.47,39.163 h1.52
  text "0" at 0.23,39.163 h1.52
  text "0" at -10.311,25.066 h1.52
  text "0" at -139.47,24.177 h1.52
  text "0" at -10.311,9.953 h1.52
  text "0" at -139.47,8.556 h1.52
  text "0" at -123.976,8.556 h1.52

## Text inside footprints (layer, text, board x,y; h text height)
D1: Top Overlay "+" at -29.591,28.368 h1.52
D2: Top Overlay "+" at -129.31,-99.775 h1.52 r90
D3: Top Overlay "+" at -40.537,-99.775 h1.52 r90
D4: Top Overlay "+" at -126.135,-93.425 h1.52 r90
D5: Top Overlay "+" at -37.362,-93.552 h1.52 r90
D6: Top Overlay "+" at -76.454,-100.203 h1.52 r90
D7: Top Overlay "+" at -122.96,-87.075 h1.52 r90
D8: Top Overlay "+" at -34.187,-87.202 h1.52 r90
D9: Top Overlay "+" at -76.454,-93.218 h1.52 r90
D10: Top Overlay "+" at -119.785,-80.852 h1.52 r90
D11: Top Overlay "+" at -31.139,-80.852 h1.52 r90
D12: Top Overlay "+" at -76.454,-86.233 h1.52 r90
D13: Top Overlay "+" at -114.705,-87.075 h1.52 r90
D14: Top Overlay "+" at -25.932,-87.202 h1.52 r90
D15: Top Overlay "+" at -76.454,-79.121 h1.52 r90
D16: Top Overlay "+" at -110.387,-93.425 h1.52 r90
D17: Top Overlay "+" at -21.614,-93.552 h1.52 r90
D18: Top Overlay "+" at -69.723,-89.662 h1.52 r90
D19: Top Overlay "+" at -105.815,-87.075 h1.52 r90
D20: Top Overlay "+" at -17.042,-87.202 h1.52 r90
D21: Top Overlay "+" at -62.865,-89.662 h1.52 r90
D22: Top Overlay "+" at -101.116,-80.598 h1.52 r90
D23: Top Overlay "+" at -12.343,-80.852 h1.52 r90
D24: Top Overlay "+" at -56.007,-79.248 h1.52 r90
D25: Top Overlay "+" at -98.068,-87.075 h1.52 r90
D26: Top Overlay "+" at -9.295,-87.202 h1.52 r90
D27: Top Overlay "+" at -95.02,-93.425 h1.52 r90
D28: Top Overlay "+" at -6.247,-93.552 h1.52 r90
D29: Top Overlay "+" at -3.199,-99.775 h1.52 r90
D30: Top Overlay "+" at -91.972,-99.775 h1.52 r90
D31: Top Overlay "+" at -56.007,-86.233 h1.52 r90
D32: Top Overlay "+" at -56.007,-93.218 h1.52 r90
D33: Top Overlay "+" at -56.007,-100.203 h1.52 r90
P1: Top Overlay "2" at -101.751,34.083 h1.27; Top Overlay "1" at -101.751,31.543 h1.27; Top Overlay "49" at -36.219,31.543 h1.27; Top Overlay "50" at -36.219,34.083 h1.27
T1: Top Overlay "1 2 3 4" at -9.525,-8.462 h2.5 r270